# Altium PCB PCI long card universal - 32 BIT.PCBDOC
Units mil, origin at the board's own origin, x right, y up, seen from the top; angles counter-clockwise.
Board outline 12283 x 4200 mil, 10 copper layers (TopLayer, MidLayer1, MidLayer2, MidLayer3, MidLayer4, MidLayer5, MidLayer6, MidLayer7, MidLayer8, BottomLayer); 1 components, 0 nets, 120 pads, 0 vias.
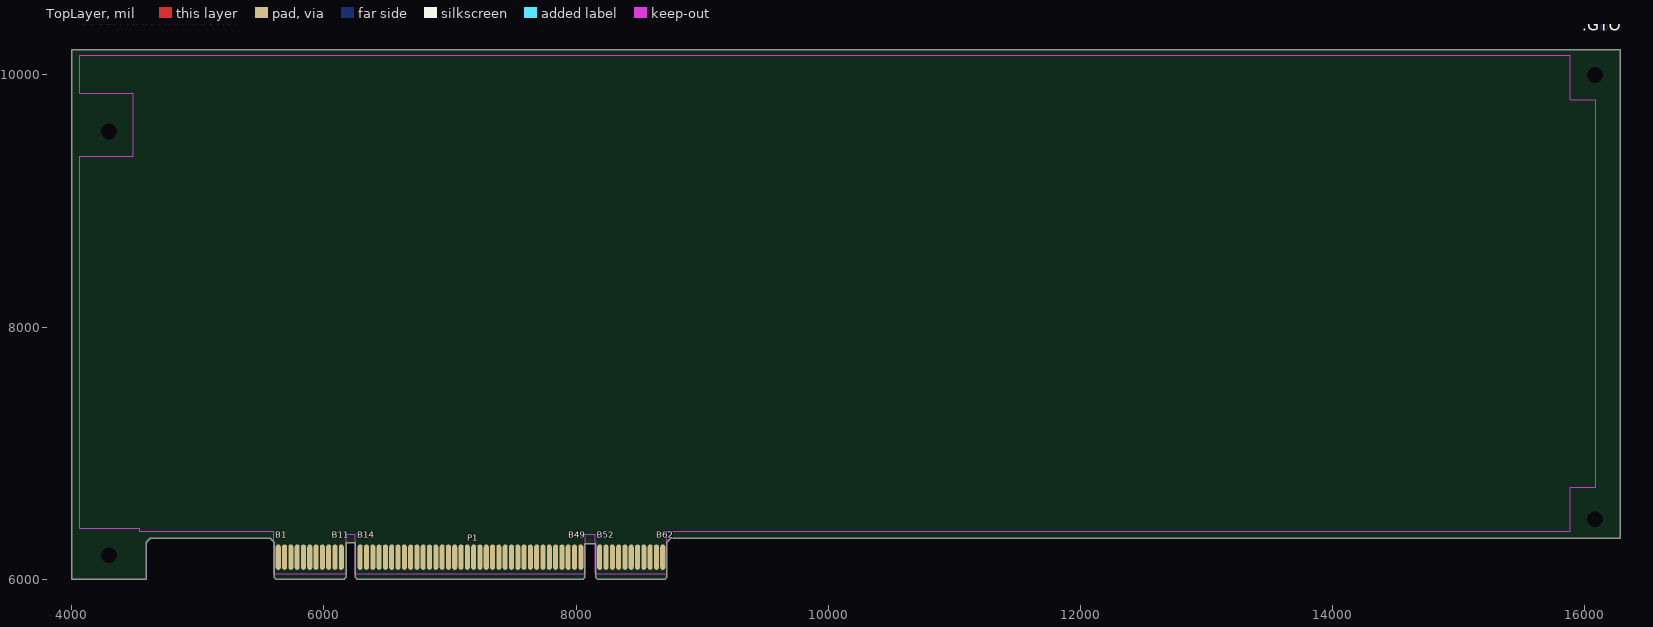
[diagram p0: TopLayer view]
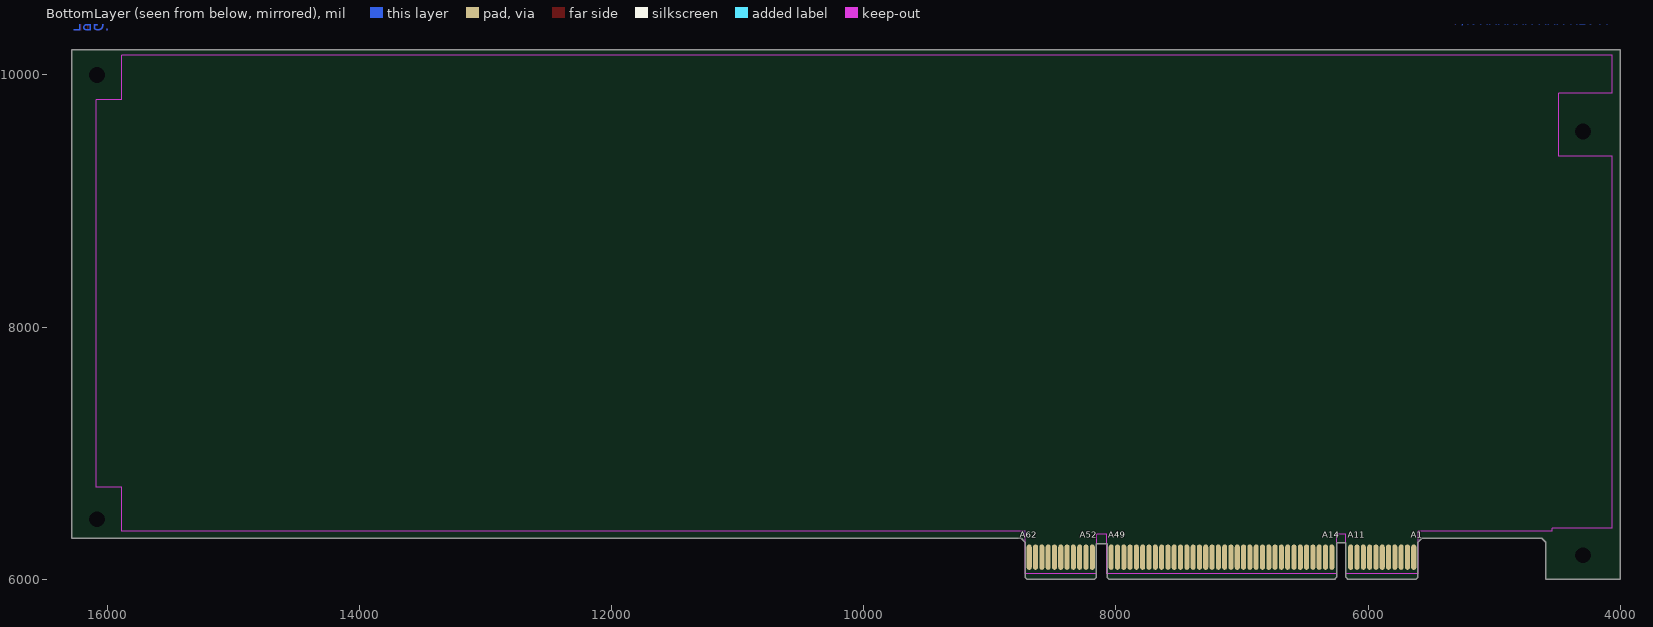
[diagram p1: BottomLayer view, seen from below]
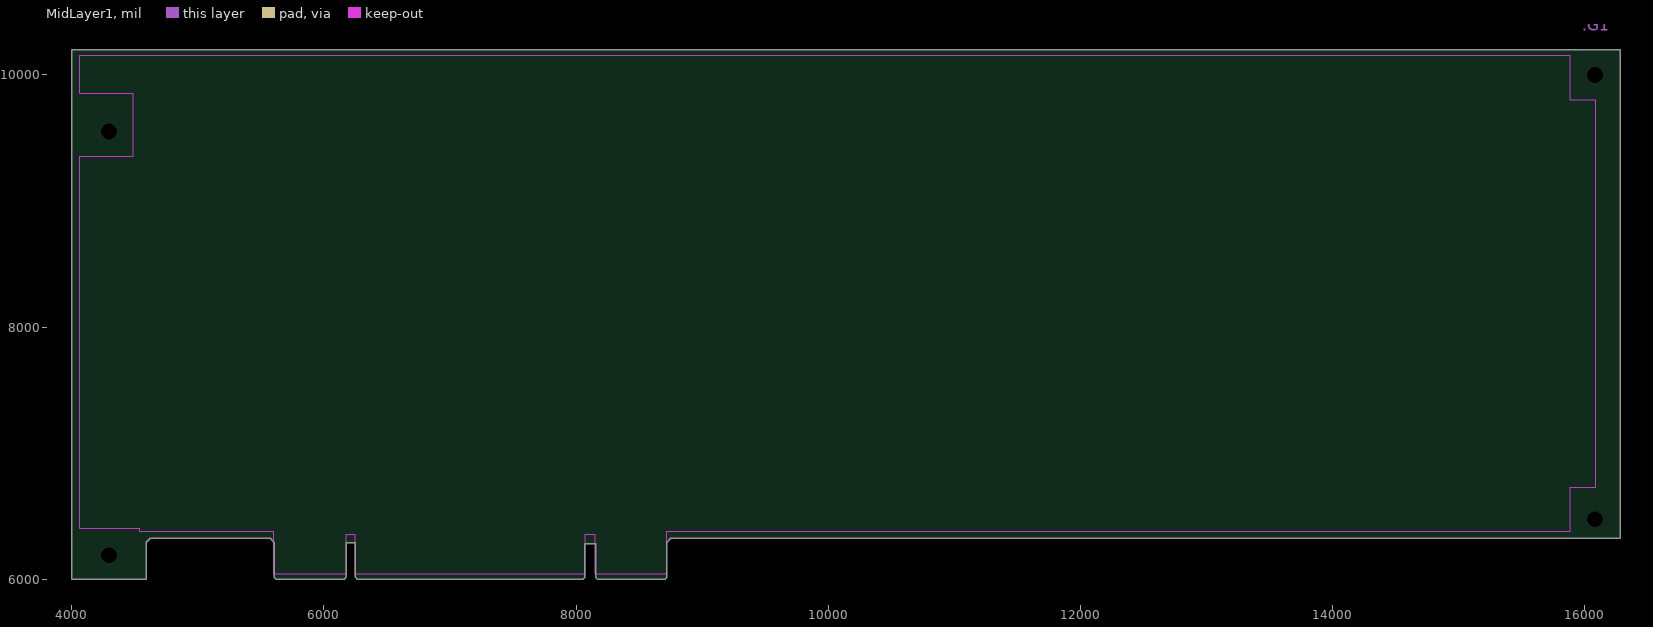
[diagram p2: MidLayer1]
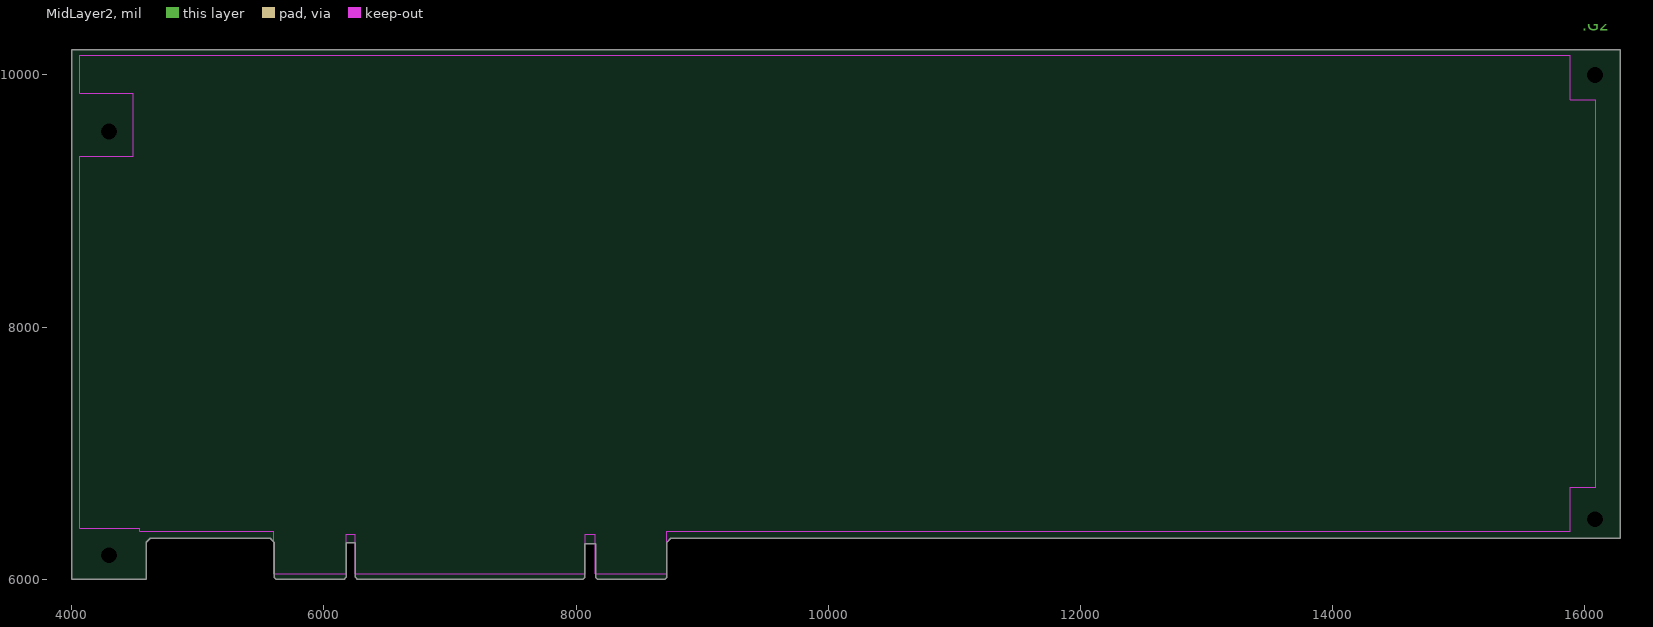
[diagram p3: MidLayer2]
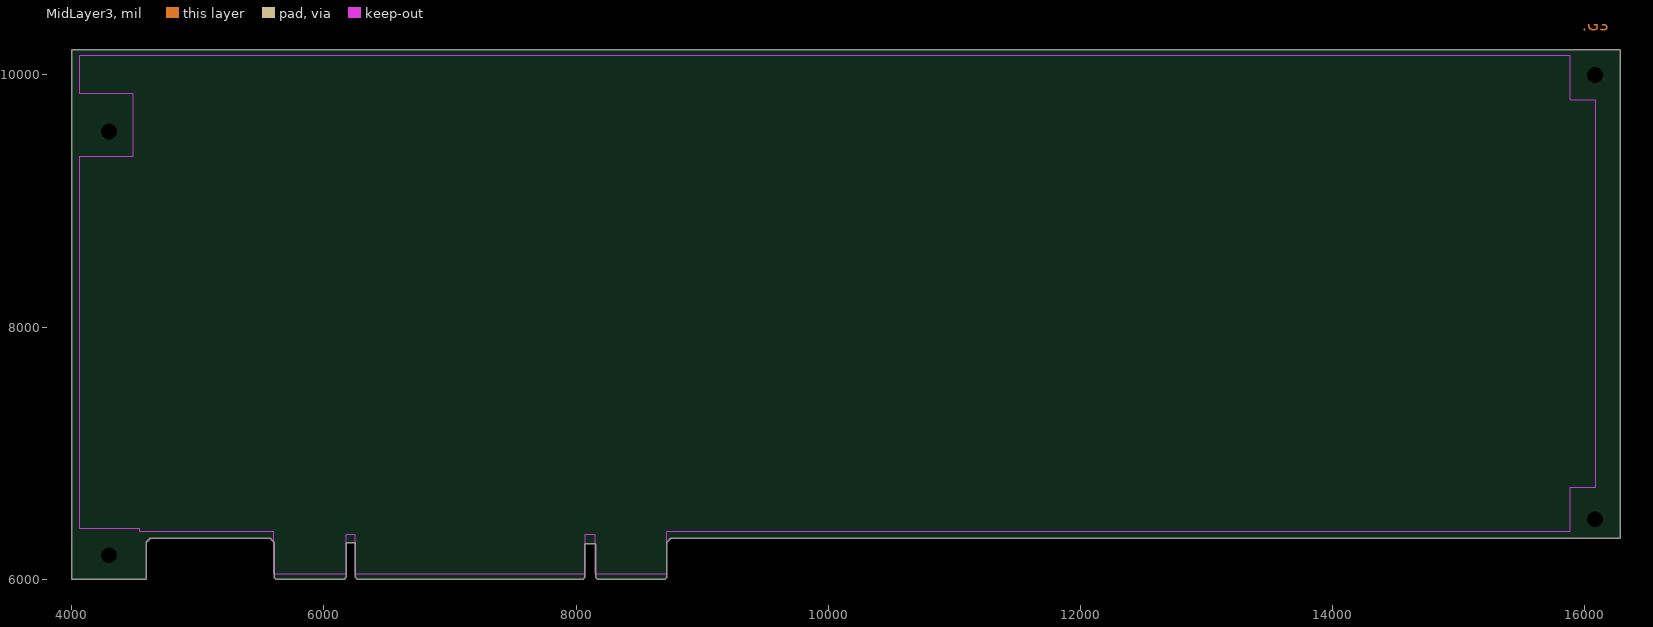
[diagram p4: MidLayer3]
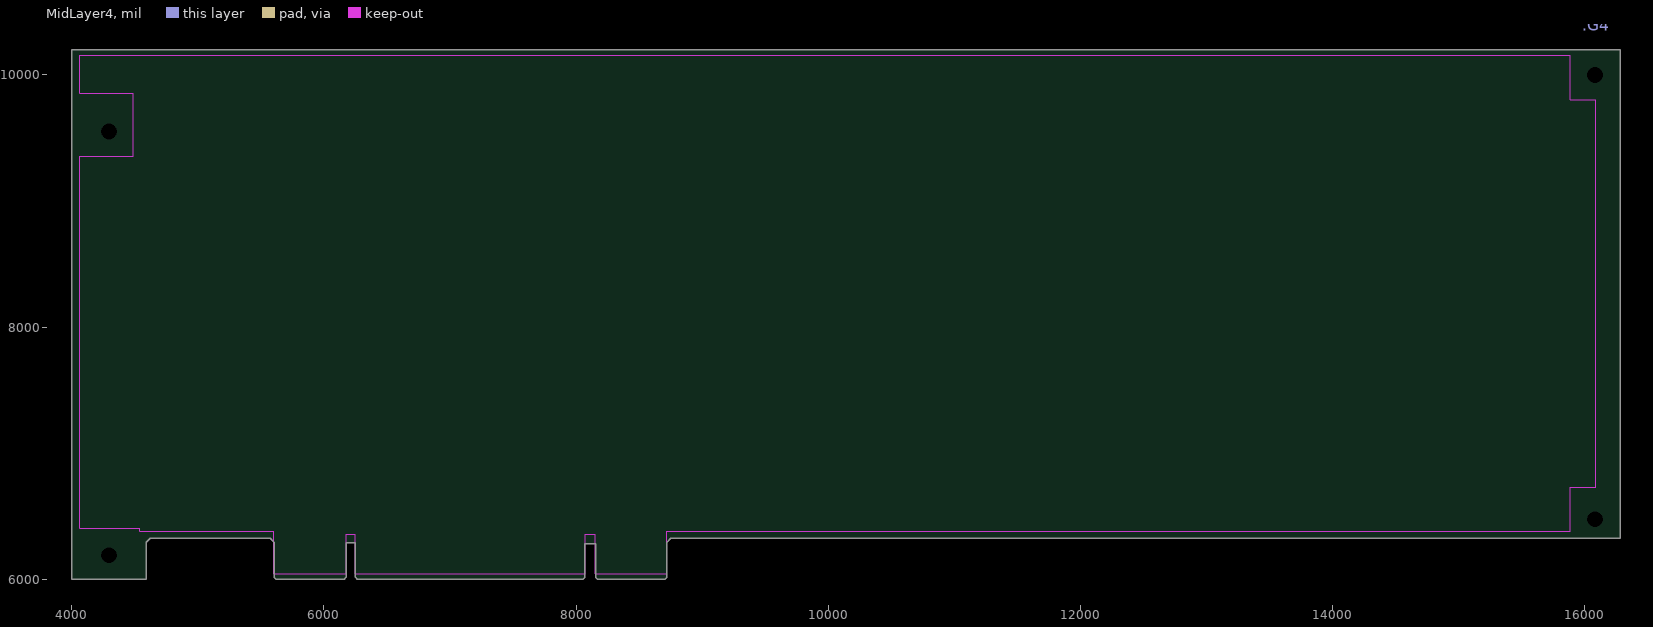
[diagram p5: MidLayer4]
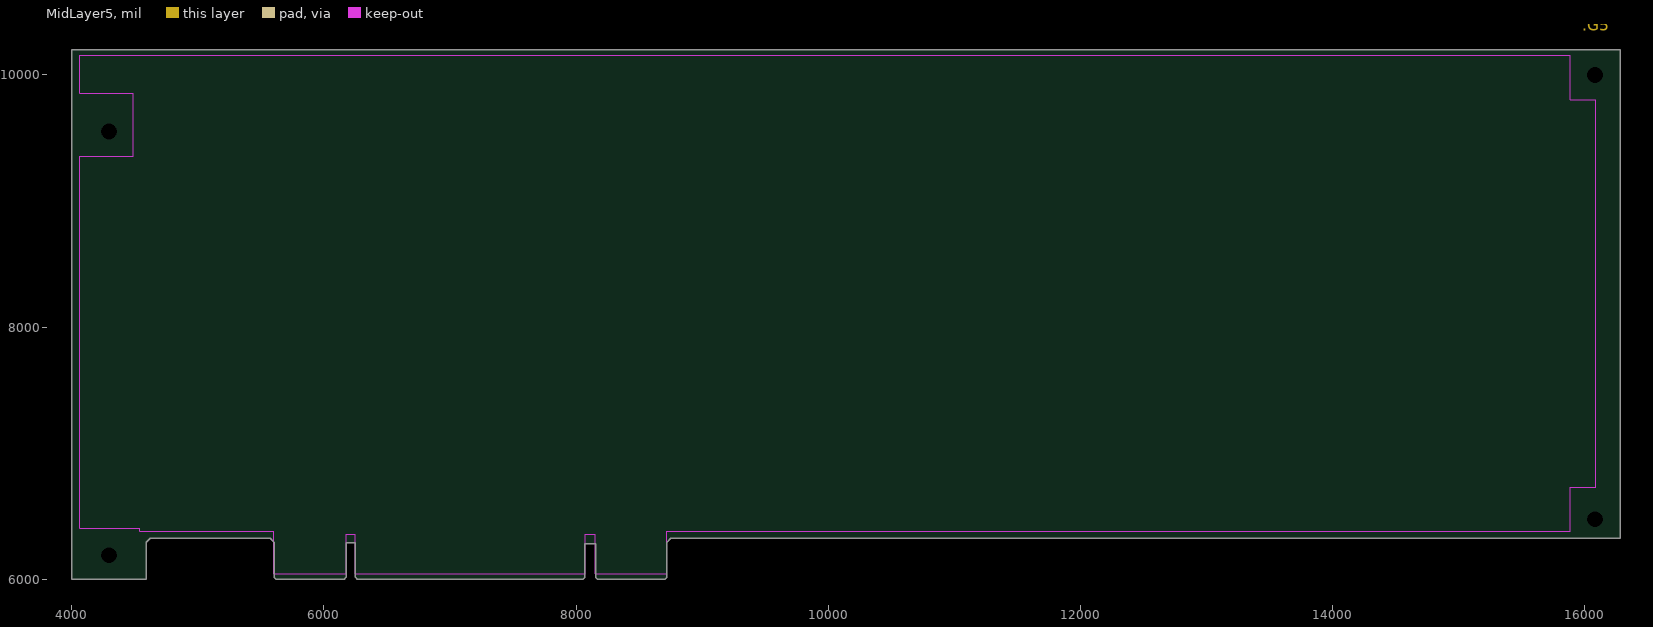
[diagram p6: MidLayer5]
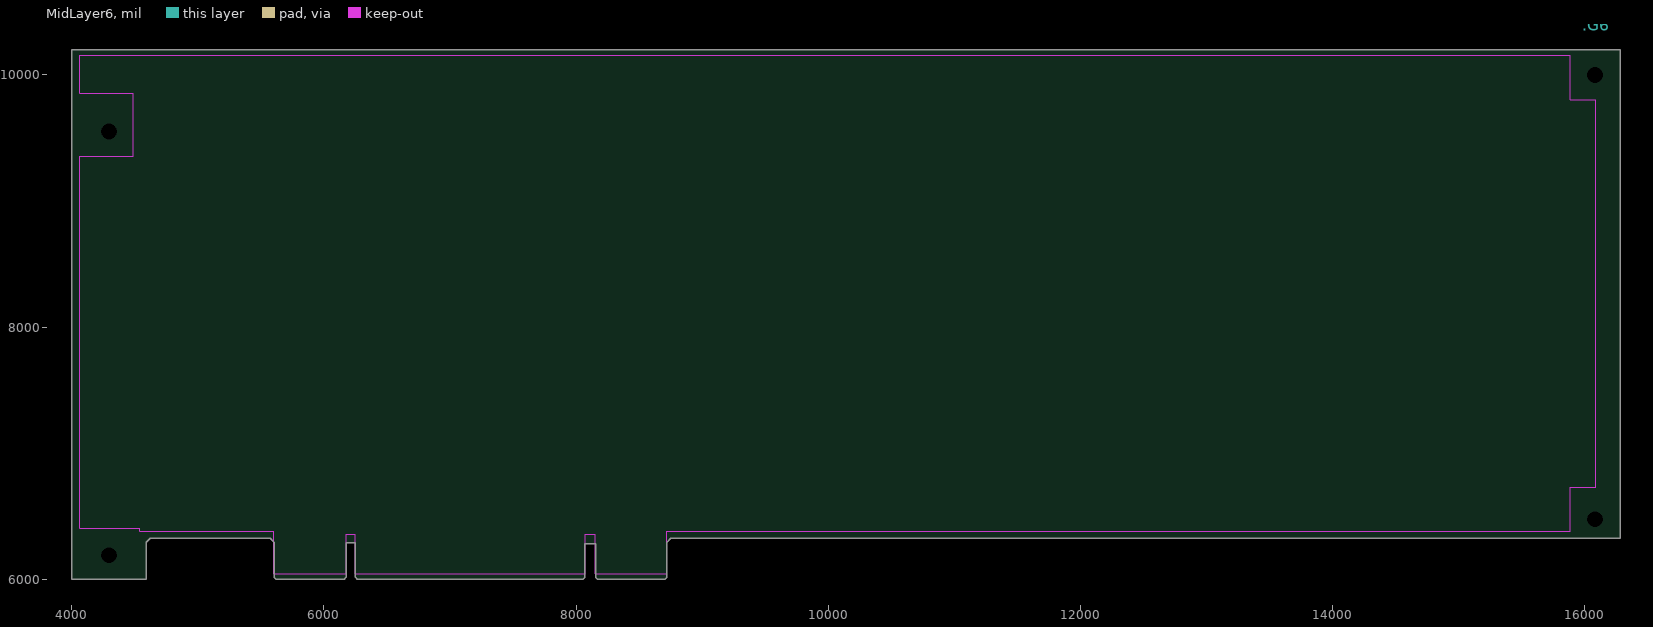
[diagram p7: MidLayer6]
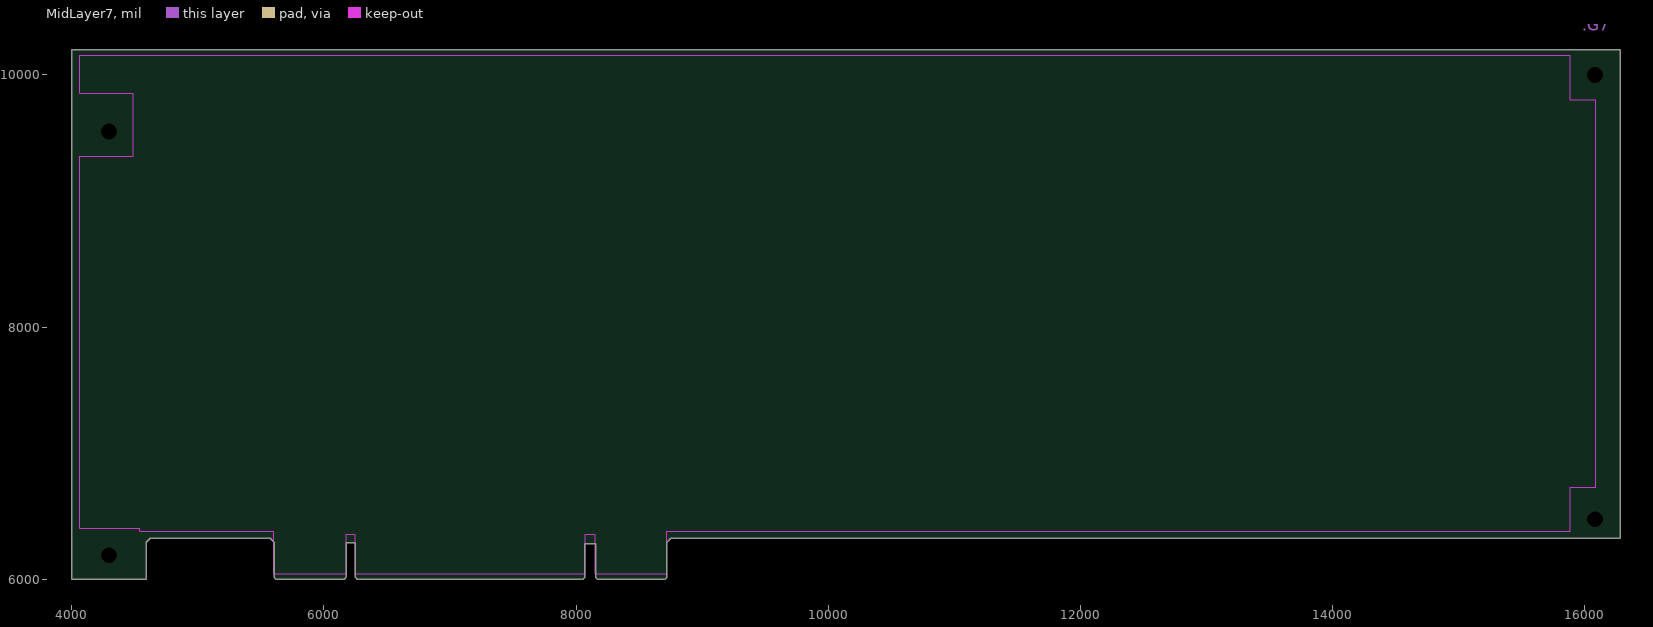
[diagram p8: MidLayer7]
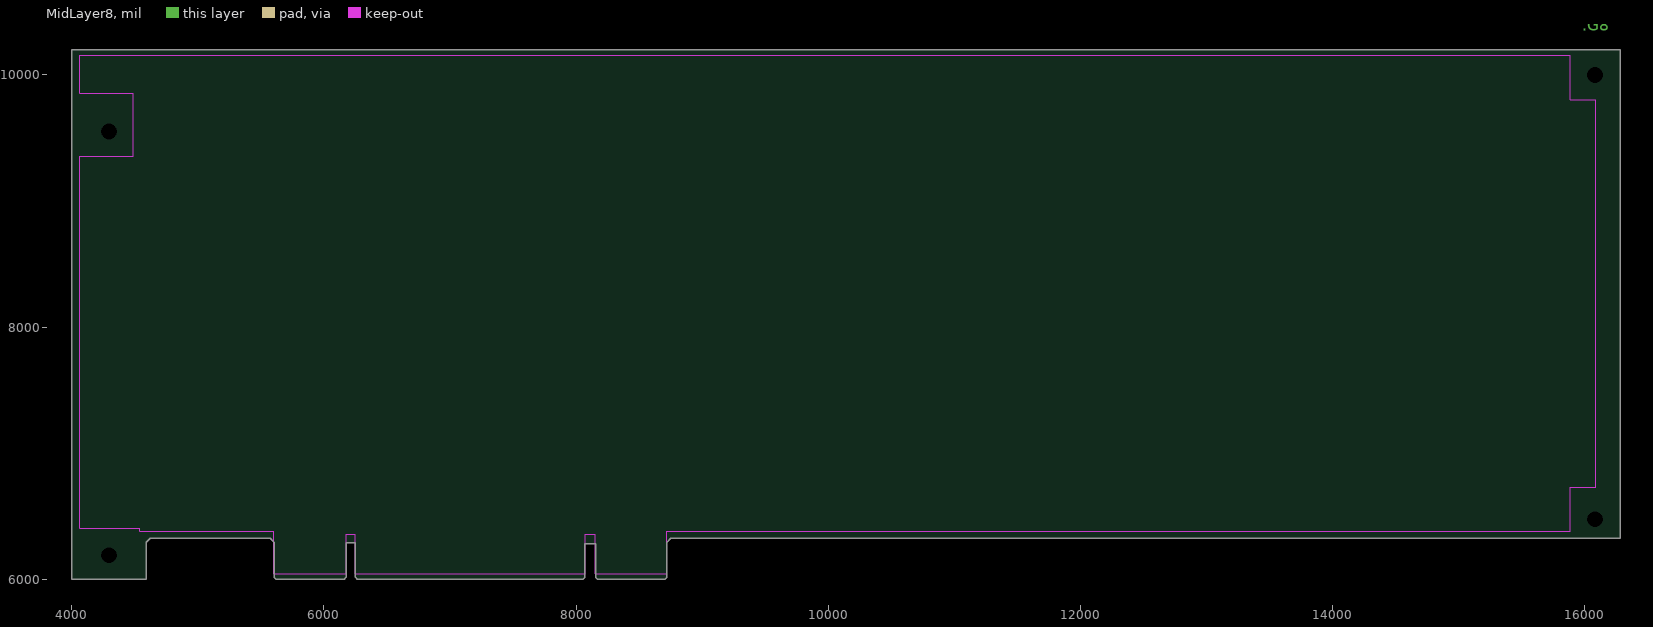
[diagram p9: MidLayer8]

## Layer stack, top to bottom
TopLayer: signal copper 1.4
Dielectric: core 12.6, FR-4, Dk 4.8
MidLayer1: signal copper 1.4
Dielectric: prepreg 12.6, FR-4, Dk 4.8
MidLayer2: signal copper 1.4
Dielectric: core 12.6, FR-4, Dk 4.8
MidLayer3: signal copper 1.4
Dielectric: prepreg 12.6, FR-4, Dk 4.8
MidLayer4: signal copper 1.4
Dielectric: core 12.6, FR-4, Dk 4.8
MidLayer5: signal copper 1.4
Dielectric: prepreg 12.6, FR-4, Dk 4.8
MidLayer6: signal copper 1.4
Dielectric: core 12.6, FR-4, Dk 4.8
MidLayer7: signal copper 1.4
Dielectric: prepreg 12.6, FR-4, Dk 4.8
MidLayer8: signal copper 1.4
Dielectric: core 12.6, FR-4, Dk 4.8
BottomLayer: signal copper 1.4

## Board outline
4000,6000 4591,6000 4591,6294 4622,6325 5574,6325 5605,6294 5605,6015 5620,6000 6161,6000 6176,6015 6176,6288 6250,6288 6250,6015 6265,6000 8056,6000 8071,6015 8071,6283 8155,6283 8155,6015 8170,6000 8706,6000 8721,6015 8721,6294 8752,6325 16283,6325 16283,10200 4000,10200

## Design rules (kind name [scope] priority, off if disabled: settings)
Clearance [All] p1: gap=10
FabricationTestPointUsage TestPointUsage [All] p1: valid=0 allowmultiple=FALSE
FabricationTestpoint Testpoint [All] p1: side=3 testpointundercomponent=TRUE minsize=40 maxsize=100 preferedsize=60 minholesize=20 maxholesize=40 preferedholesize=32 testpointgrid=1 allowsidetop=TRUE allowsidebottom=TRUE usegrid=TRUE gridtolerance=0.01
PasteMaskExpansion PasteMaskExpansion_1 [InComponent('P1')] p1: expansion=-100
PasteMaskExpansion [All] p2: expansion=0
PlaneClearance [All] p1: clearance=10
PolygonConnect [All] p1: connectstyle=Relief reliefconductorwidth=10 reliefentries=4 polygonreliefangle="90 Angle"
RoutingVias [All] p1: holewidth=28 width=50 viastyle="Through Hole" minholewidth=28 minwidth=50 maxholewidth=28 maxwidth=50
SilkscreenOverComponentPads [All] p1: minsilkscreentomaskgap=10
SolderMaskExpansion [All] p1: expansion=2
Width [All] p1: maxlimit=10 minlimit=10 preferedwidth=10
23 further rules are at their usual default settings.

## Components (designator, comment, footprint, x,y, rotation, side; value= is the part's Value field where it differs from the comment)
P1 "PCIUV32BIT" PCIUV32BIT 5638,6175 r0 top locked

## Footprints (in the part's own frame and the unit in brackets; to place one, negate y for a bottom-side part, rotate by r counter-clockwise, add the part's x,y. Pads: shape width x height; smd on the part's side, far side on the other; paste and mask are expansions set on the pad)
PCIUV32BIT [mil]
  oval 40x200 smd far side: A1(0,0) A2(50,0) A3(100,0) A4(150,0) A5(200,0) A6(250,0) A7(300,0) A8(350,0) A9(400,0) A10(450,0) A11(500,0) A14(650,0) A15(700,0) A16(750,0) A17(800,0) A18(850,0) A19(900,0) A20(950,0) A21(1000,0) A22(1050,0) A23(1100,0) A24(1150,0) A25(1200,0) A26(1250,0) A27(1300,0) A28(1350,0) A29(1400,0) A30(1450,0) A31(1500,0) A32(1550,0) A33(1600,0) A34(1650,0) A35(1700,0) A36(1750,0) A37(1800,0) A38(1850,0) A39(1900,0) A40(1950,0) A41(2000,0) A42(2050,0) A43(2100,0) A44(2150,0) A45(2200,0) A46(2250,0) A47(2300,0) A48(2350,0) A49(2400,0) A52(2550,0) A53(2600,0) A54(2650,0) A55(2700,0) A56(2750,0) A57(2800,0) A58(2850,0) A59(2900,0) A60(2950,0) A61(3000,0) A62(3050,0)
  oval 40x200 smd: B1(0,0) B2(50,0) B3(100,0) B4(150,0) B5(200,0) B6(250,0) B7(300,0) B8(350,0) B9(400,0) B10(450,0) B11(500,0) B14(650,0) B15(700,0) B16(750,0) B17(800,0) B18(850,0) B19(900,0) B20(950,0) B21(1000,0) B22(1050,0) B23(1100,0) B24(1150,0) B25(1200,0) B26(1250,0) B27(1300,0) B28(1350,0) B29(1400,0) B30(1450,0) B31(1500,0) B32(1550,0) B33(1600,0) B34(1650,0) B35(1700,0) B36(1750,0) B37(1800,0) B38(1850,0) B39(1900,0) B40(1950,0) B41(2000,0) B42(2050,0) B43(2100,0) B44(2150,0) B45(2200,0) B46(2250,0) B47(2300,0) B48(2350,0) B49(2400,0) B52(2550,0) B53(2600,0) B54(2650,0) B55(2700,0) B56(2750,0) B57(2800,0) B58(2850,0) B59(2900,0) B60(2950,0) B61(3000,0) B62(3050,0)

## Free pads (board coordinates)
  round 50 hole 125: 1(16083,6475) 2(16083,10000) 3(4295,9552) 4(4295,6190)

## Nets (pads, with @x,y where several pads share a name; then routed paths per layer and width w, separated by ;. In a path a pad name is that pad's centre, name@x,y a point inside that pad or via, vN(x,y) a via of type N, cw(c..) or ccw(c..) an arc to the next point about the centre after c; other vN are vias at no path point)
pads on no net: P1.A1 P1.A2 P1.A3 P1.A4 P1.A5 P1.A6 P1.A7 P1.A8 P1.A9 P1.A10 P1.A11 P1.A14 P1.A15 P1.A16 P1.A17 P1.A18 P1.A19 P1.A20 P1.A21 P1.A22 P1.A23 P1.A24 P1.A25 P1.A26 P1.A27 P1.A28 P1.A29 P1.A30 P1.A31 P1.A32 P1.A33 P1.A34 P1.A35 P1.A36 P1.A37 P1.A38 P1.A39 P1.A40 P1.A41 P1.A42 P1.A43 P1.A44 P1.A45 P1.A46 P1.A47 P1.A48 P1.A49 P1.A52 P1.A53 P1.A54 P1.A55 P1.A56 P1.A57 P1.A58 P1.A59 P1.A60 P1.A61 P1.A62 P1.B1 P1.B2 P1.B3 P1.B4 P1.B5 P1.B6 P1.B7 P1.B8 P1.B9 P1.B10 P1.B11 P1.B14 P1.B15 P1.B16 P1.B17 P1.B18 P1.B19 P1.B20 P1.B21 P1.B22 P1.B23 P1.B24 P1.B25 P1.B26 P1.B27 P1.B28 P1.B29 P1.B30 P1.B31 P1.B32 P1.B33 P1.B34 P1.B35 P1.B36 P1.B37 P1.B38 P1.B39 P1.B40 P1.B41 P1.B42 P1.B43 P1.B44 P1.B45 P1.B46 P1.B47 P1.B48 P1.B49 P1.B52 P1.B53 P1.B54 P1.B55 P1.B56 P1.B57 P1.B58 P1.B59 P1.B60 P1.B61 P1.B62

## Keep-outs
KeepOutLayer:
  lines w8: 4063,6405 4538,6405 4538,6380 5603,6380 5603,6045 6178,6045 6178,6355 6248,6355 6248,6045 8073,6045 8073,6355 8153,6355 8153,6045 8718,6045 8718,6380 15888,6380 15888,6730 16088,6730 16088,9805 15888,9805 15888,10155 4063,10155 4063,9855 4488,9855 4488,9355 4063,9355 4063,6405

## Other copper
TopLayer:
  text ".GTL" at 15983,10350 h90
MidLayer1:
  text ".G1" at 15983,10350 h90
MidLayer2:
  text ".G2" at 15983,10350 h90
MidLayer3:
  text ".G3" at 15983,10350 h90
MidLayer4:
  text ".G4" at 15983,10350 h90
MidLayer5:
  text ".G5" at 15983,10350 h90
MidLayer6:
  text ".G6" at 15983,10350 h90
MidLayer7:
  text ".G7" at 15983,10350 h90
MidLayer8:
  text ".G8" at 15983,10350 h90
BottomLayer:
  text "P/N XXXXXX-XXX REV A" at 5320,10400 h75
  text ".GBL" at 15983,10350 h90

## Silkscreen, mask and mechanical layers (free items; w line width, h text height)
TopOverlay:
  rectangle: 4281,10893 5031,11093
  rectangle: 4281,10603 5031,10803
  lines w10: 5392.59,10995.97 ccw(c5441,11035.5) 5392.71,10995.83
  text "C" at 5496,10998 h60
  text "2002 COMPANY NAME" at 5646,10998 h75
  text "S/N" at 4031,10950.5 h75
  text "BOARD NAME" at 5496,10823 h75
  text "ASSY NO.: XXXXXX" at 5496,10673 h75
  text "REV" at 4031,10653 h75
  text ".GTO" at 15983,10350 h90
TopPaste:
  text ".GTP" at 15983,10350 h90
  text ".GTP" at 15983,10350 h90
BottomPaste:
  text ".GBP" at 15983,10350 h90
  text ".GBP" at 15983,10350 h90
TopSolder:
  rectangle: 5583,5980 8738,6280
  text ".GTS" at 15983,10350 h90
  text ".GTS" at 15983,10350 h90
BottomSolder:
  rectangle: 5583,5980 8738,6280
  text ".GBS" at 15983,10350 h90
  text ".GBS" at 15983,10350 h90
Mechanical1:
  the board outline again, w20
Mechanical4:
  circle w10: c5578.67,6044.32 r100
  lines w8: 16948,7380 17123,7380 17123,7085 ; 17048,6880 17448,6880 ; 17048,7080 17398,7080 ; 17123,6580 17123,6875 ; 17210.5,6555 17505.5,6555 ; 17285.5,8105 17593,8105 ; 17510.5,6480 17510.5,6830 ; 17535.5,6480 17535.5,6830 ; 17598,7880 17598,8180 ; 17623,7130 17898,8130 ; 17835.5,6555 17540.5,6555 ; 18167.72,7950.07 17878.77,8055.24 ; 17123,6875 17148,6725 17098,6725 17123,6875 ; 17123,7085 17148,7235 17098,7235 17123,7085 ; 17505.5,6555 17355.5,6580 17355.5,6530 17505.5,6555 ; 17540.5,6555 17690.5,6580 17690.5,6530 17540.5,6555 ; 17593,8105 17443,8130 17443,8080 17593,8105 ; 17878.77,8055.24 18028.27,8027.43 18011.17,7980.45 17878.77,8055.24 ; 17103,6730 17123,6865 17143,6730 17103,6730 ; 17103,7230 17143,7230 17123,7095 17103,7230 ; 17108,6735 17123,6855 17138,6735 17108,6735 ; 17108,7225 17138,7225 17123,7105 17108,7225 ; 17113,6740 17123,6845 17133,6740 17113,6740 ; 17113,7220 17133,7220 17123,7115 17113,7220 ; 17118,6745 17123,6835 17128,6745 17118,6745 ; 17118,7215 17128,7215 17123,7125 17118,7215 ; 17360.5,6535 17360.5,6575 17495.5,6555 17360.5,6535 ; 17365.5,6540 17365.5,6570 17485.5,6555 17365.5,6540 ; 17370.5,6545 17370.5,6565 17475.5,6555 17370.5,6545 ; 17375.5,6550 17375.5,6560 17465.5,6555 17375.5,6550 ; 17448,7080 17448,7842.5 17485.5,7842.5 17498,7780 17560.5,7930 17560.5,7842.5 17598,7842.5 17598,7080 17535.5,6880 17510.5,6880 17448,7080 ; 17448,8085 17448,8125 17583,8105 17448,8085 ; 17453,8090 17453,8120 17573,8105 17453,8090 ; 17458,8095 17458,8115 17563,8105 17458,8095 ; 17463,8100 17463,8110 17553,8105 17463,8100 ; 17550.5,6555 17685.5,6575 17685.5,6535 17550.5,6555 ; 17560.5,6555 17680.5,6570 17680.5,6540 17560.5,6555 ; 17570.5,6555 17675.5,6565 17675.5,6545 17570.5,6555 ; 17580.5,6555 17670.5,6560 17670.5,6550 17580.5,6555 ; 17888.16,8051.82 18021.86,8024.45 18008.18,7986.86 17888.16,8051.82 ; 17897.56,8048.4 18015.45,8021.46 18005.19,7993.27 17897.56,8048.4 ; 17906.96,8044.98 18009.05,8018.47 18002.21,7999.67 17906.96,8044.98 ; 17916.36,8041.56 18002.64,8015.48 17999.22,8006.08 17916.36,8041.56
  lines w10: 5436.67,5991.32 5436.67,6046.32 5456.67,5996.32 5436.67,5991.32 ; 5436.87,6046.16 5438,6100 5458.36,6096.79 5436.87,6046.16
  text ".Pcb_File_Name_No_Path" at 14083,10540 h90
  text ".Printout_Name" at 14083,10350 h90
  text "DETAIL A" at 17148,8380 h150
  text "o" at 17823,8142.5 h48
  text "20" at 17660.5,8042.5 h90
  text "0.071" at 16585.5,7330 h90
  text "+.010" at 16598,7180 h75
  text "-.015" at 16598,7030 h75
  text "0.010" at 17898,6505 h90
  text "+.005" at 17898,6355 h75
  text "-.010" at 17898,6205 h75
  text "SEE DETAIL A" at 4690,6000 h75
DrillDrawing:
  text ".LEGEND" at 16613,9175 h90
  text "Drilling Details." at 16613,9025 h90

## Dimensions
3980,6190 to 4000,6000 on Mechanical4
4295,5980 to 4000,6000 on Mechanical4

## Text inside footprints (layer, text, board x,y; h text height)
P1: TopOverlay "B14" at 6263,6330 h48; TopOverlay "B52" at 8163,6330 h48; TopOverlay "B62" at 8638,6330 h48; TopOverlay "B49" at 7938,6330 h48; TopOverlay "B11" at 6063,6330 h48; TopOverlay "B1" at 5613,6330 h48; BottomOverlay "A49" at 8063,6330 h48; BottomOverlay "A11" at 6163,6330 h48; BottomOverlay "A1" at 5663,6330 h48; BottomOverlay "A14" at 6363,6330 h48; BottomOverlay "A52" at 8288,6330 h48; BottomOverlay "A62" at 8763,6330 h48